# Altium PCB front.PcbDoc
Units mm, origin at the board's own origin, x right, y up, seen from the top; angles counter-clockwise.
Board outline 46.94 x 58.55 mm, 2 copper layers (Top Layer, Bottom Layer); 37 components, 16 nets, 110 pads, 10 vias.
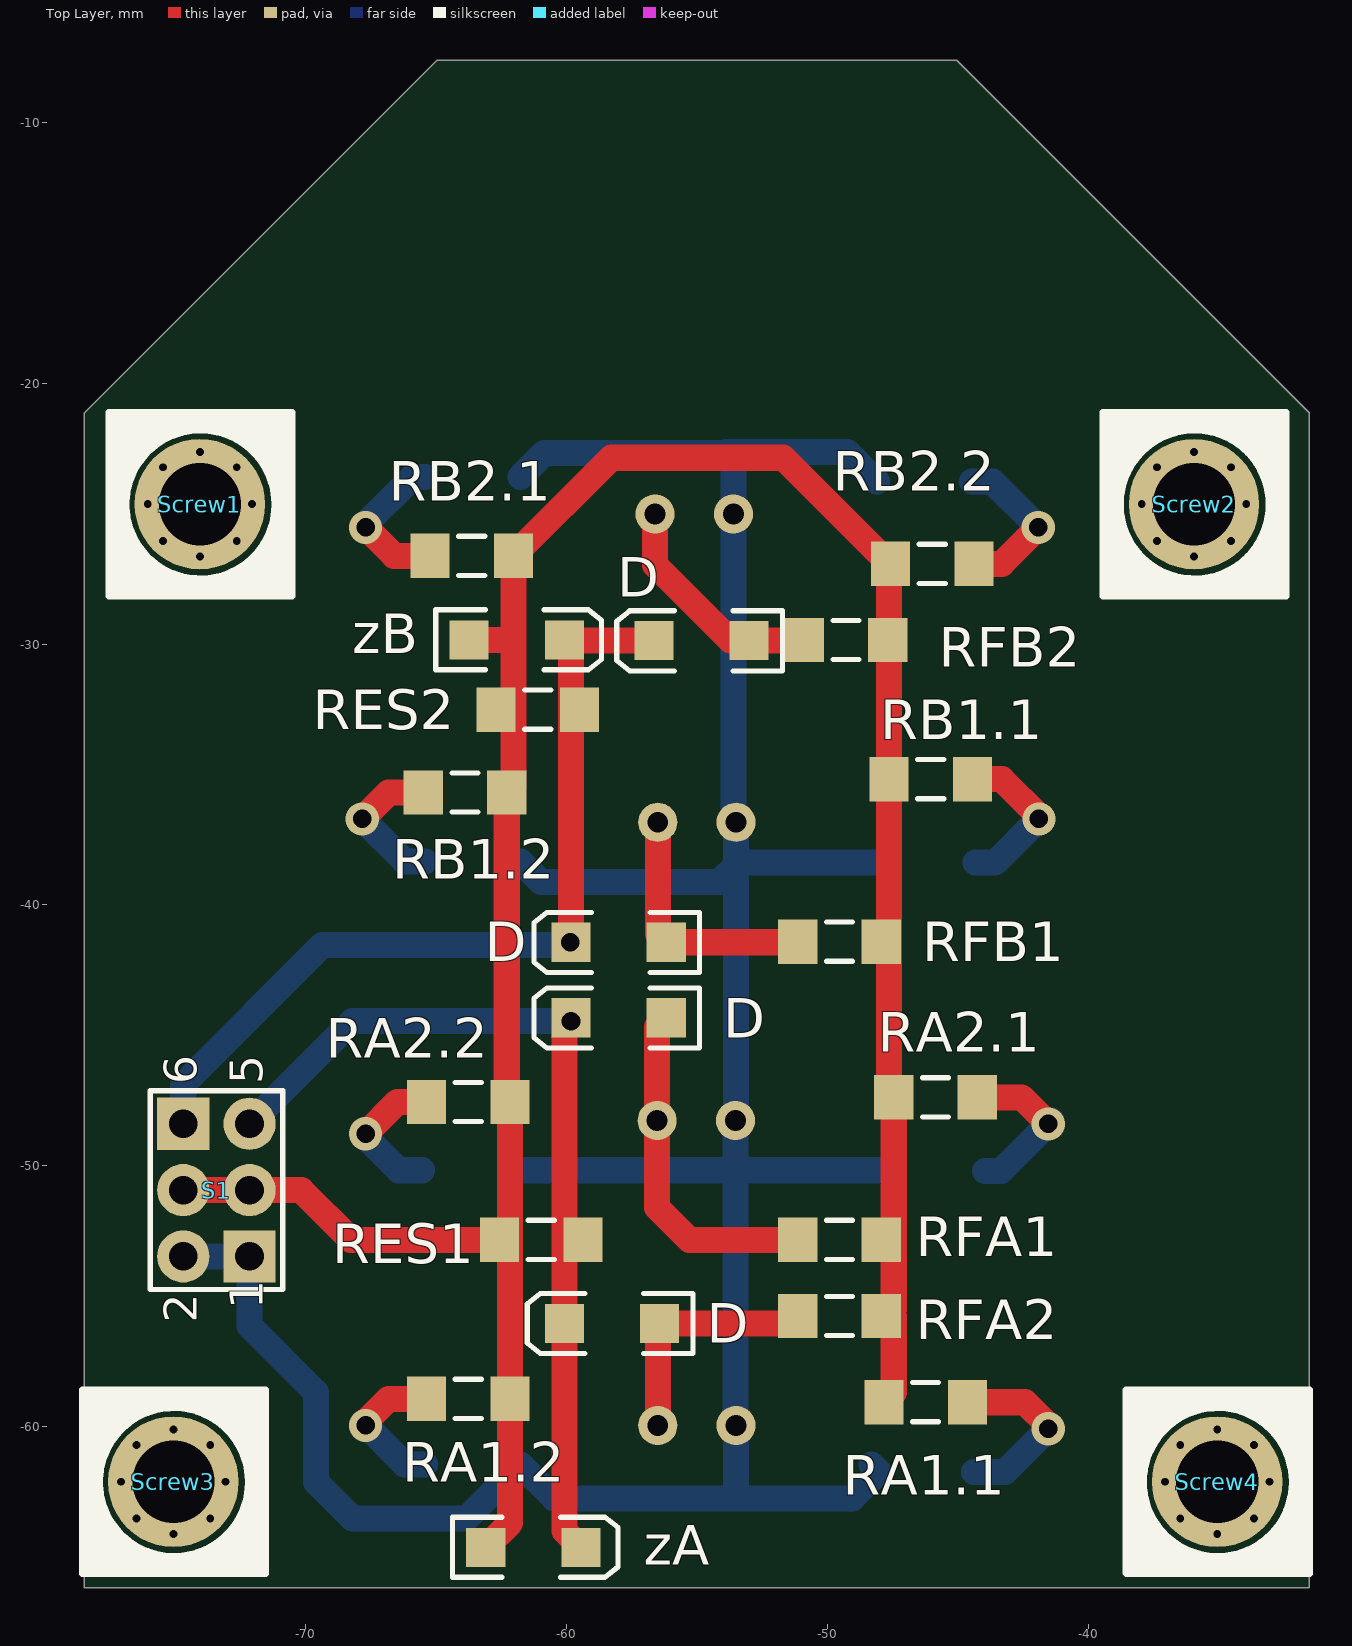
[diagram p0: Top Layer view]
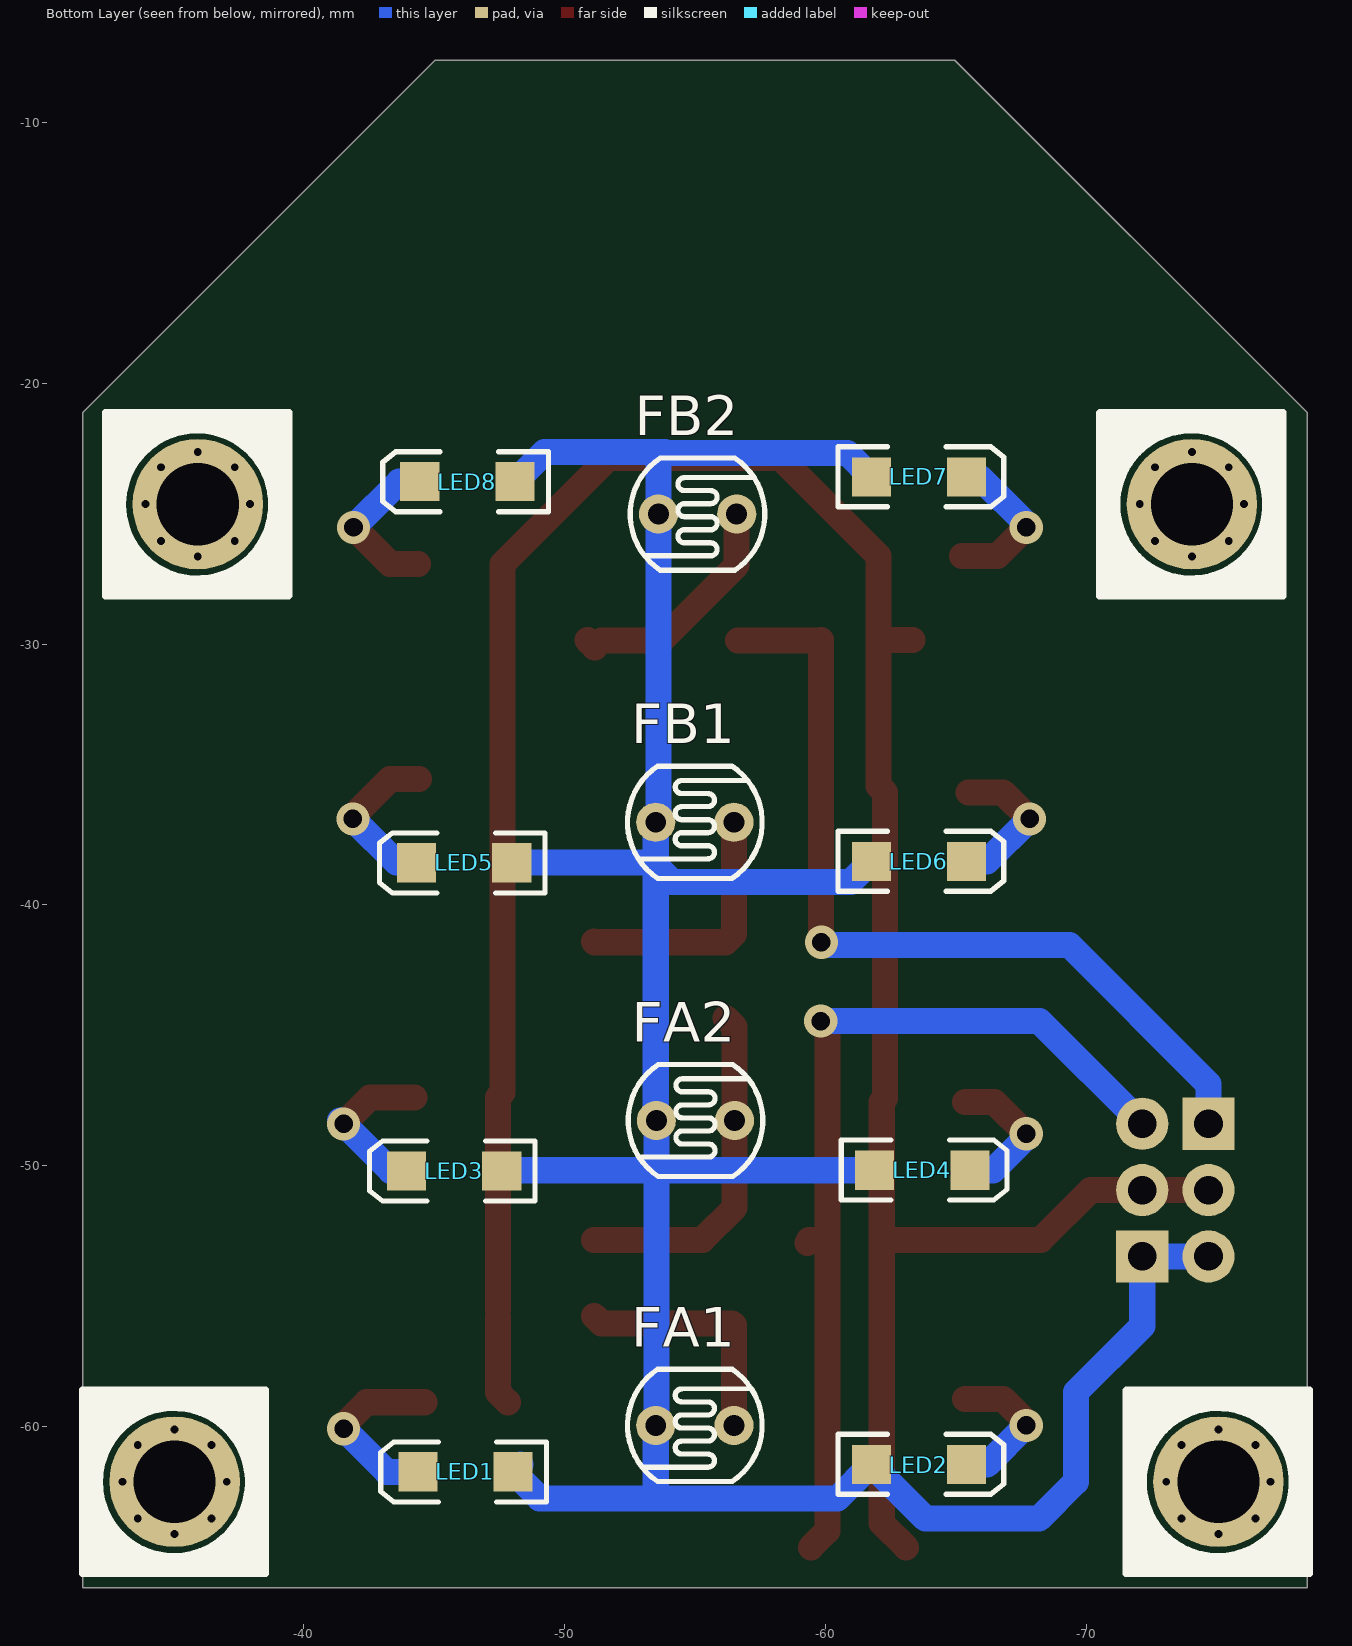
[diagram p1: Bottom Layer view, seen from below]
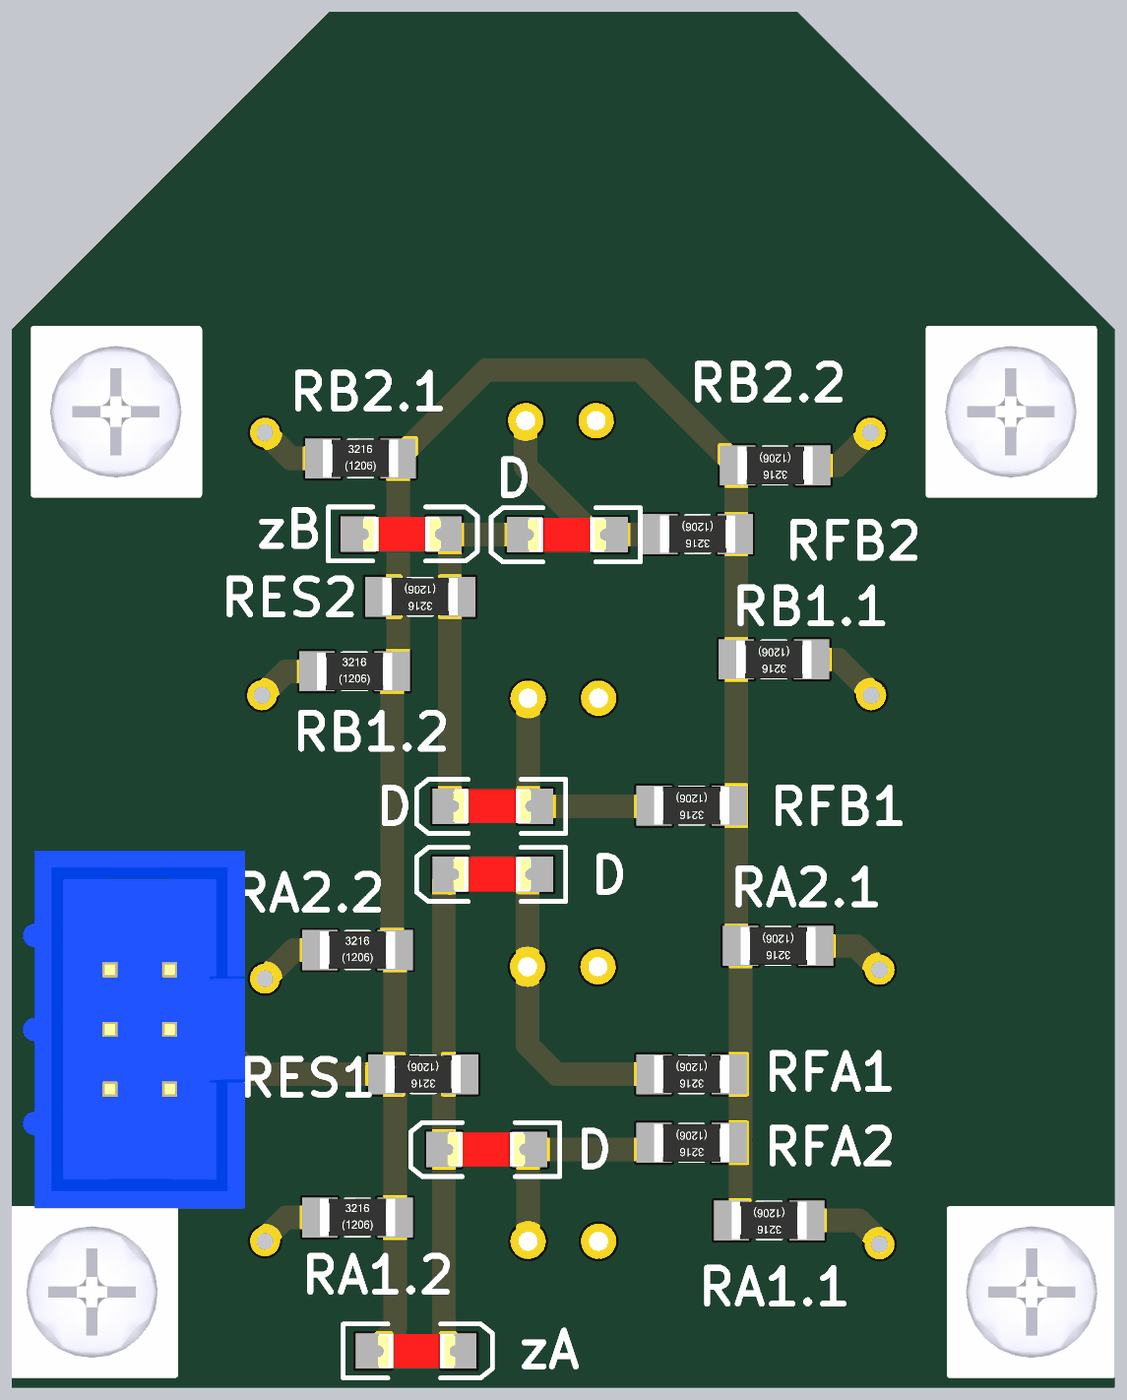
[diagram p2: 3D render of the assembled board from above, using the file's embedded part models]
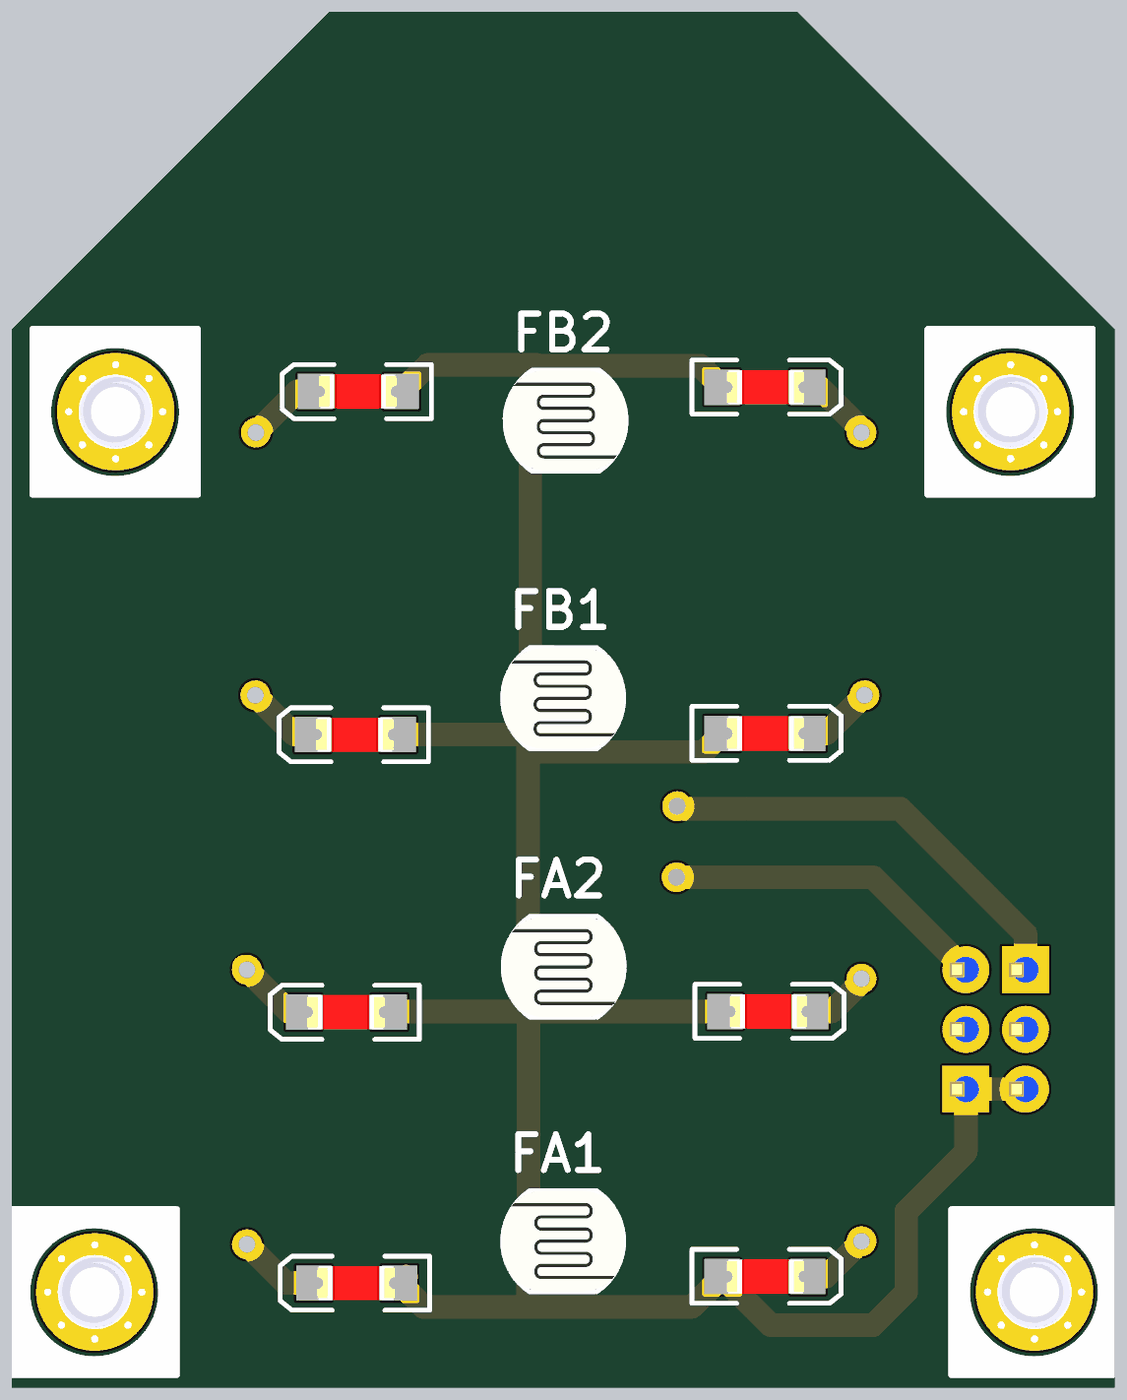
[diagram p3: 3D render of the assembled board from below, using the file's embedded part models]

## Layer stack, top to bottom
Top Solder: solder mask 0.0102, Solder Resist, Dk 3.5
Top Layer: signal copper 0.0356
Dielectric 1: dielectric 0.32, FR-4, Dk 4.8
Bottom Layer: signal copper 0.0356
Bottom Solder: solder mask 0.0102, Solder Resist, Dk 3.5

## Board outline
-78.466,-66.169 -78.466,-21.134 -64.955,-7.623 -54.995,-7.623 -45.035,-7.623 -31.524,-21.134 -31.524,-66.169 -54.995,-66.169

## Design rules (kind name [scope] priority, off if disabled: settings)
Clearance [All] p1: gap=0.5 ignorepadtopadclearanceinfootprint=FALSE
PolygonConnect [All] p1: connectstyle=Relief reliefconductorwidth=0.254 reliefentries=4 polygonreliefangle="90 Angle" airgapwidth=0.254
RoutingVias [All] p1: holewidth=0.711 width=1.27 viastyle="Through Hole" minholewidth=0.711 minwidth=1.27 maxholewidth=0.711 maxwidth=1.27
SolderMaskExpansion [All] p1: expansion=0.102
Width [All] p1: maxlimit=1 minlimit=0.254 preferedwidth=1
30 further rules are at their usual default settings.

## Components (designator, comment, footprint, x,y, rotation, side; value= is the part's Value field where it differs from the comment)
D "SMD" "LED SMD" -55.118,-29.845 r180 top (schematic designator LED12)
D "SMD" "LED SMD" -58.293,-41.402 r180 top (schematic designator LED11)
D "SMD" "LED SMD" -58.547,-56.007 r180 top (schematic designator LED10)
D "SMD" "LED SMD" -58.293,-44.298 r180 top (schematic designator LED9)
FA1 "Photo Cell" PhotoCell. -54.991,-59.944 r0 bottom
FA2 "Photo Cell" PhotoCell. -55.015,-48.26 r180 bottom
FB1 "Photo Cell" PhotoCell. -54.991,-36.83 r180 bottom
FB2 "Photo Cell" PhotoCell. -55.094,-25.019 r0 bottom
LED1 "SMD" "LED SMD" -45.899,-61.697 r0 bottom
LED2 "SMD" "LED SMD" -63.881,-61.468 r180 bottom
LED3 "SMD" "LED SMD" -45.466,-50.165 r0 bottom
LED4 "SMD" "LED SMD" -64.007,-50.19 r180 bottom
LED5 "SMD" "LED SMD" -45.847,-38.354 r0 bottom
LED6 "SMD" "LED SMD" -63.881,-38.354 r180 bottom
LED7 "SMD" "LED SMD" -63.881,-23.622 r180 bottom
LED8 "SMD" "LED SMD" -45.974,-23.749 r0 bottom
RA1.1 "SMD" "Resistor SMD 1206" -46.228,-59.055 r180 top (schematic designator RESFA1.1)
RA1.2 "SMD" "Resistor SMD 1206" -63.754,-58.928 r0 top (schematic designator RESFA1.2)
RA2.1 "SMD" "Resistor SMD 1206" -45.847,-47.371 r180 top (schematic designator RESFA2.1)
RA2.2 "SMD" "Resistor SMD 1206" -63.754,-47.549 r0 top (schematic designator RESFA2.2)
RB1.1 "SMD" "Resistor SMD 1206" -46.025,-35.179 r180 top (schematic designator RESFB1.1)
RB1.2 "SMD" "Resistor SMD 1206" -63.881,-35.687 r0 top (schematic designator RESFB1.2)
RB2.1 "SMD" "Resistor SMD 1206" -63.627,-26.622 r0 top (schematic designator RESFB2.1)
RB2.2 "SMD" "Resistor SMD 1206" -45.974,-26.924 r180 top (schematic designator RESFB2.2)
RES1 "SMD" "Resistor SMD 1206" -60.96,-52.832 r180 top
RES2 "SMD" "Resistor SMD 1206" -61.087,-32.512 r180 top
RFA1 "SMD" "Resistor SMD 1206" -49.53,-52.832 r180 top (schematic designator RESFA1)
RFA2 "SMD" "Resistor SMD 1206" -49.53,-55.753 r180 top (schematic designator RESFA2)
RFB1 "SMD" "Resistor SMD 1206" -49.53,-41.402 r180 top (schematic designator RESFB1)
RFB2 "SMD" "Resistor SMD 1206" -49.276,-29.845 r180 top (schematic designator RESFB2)
S1 "IDC 2X3" "IDC 2X3" -73.406,-50.927 r90 top
Screw1 "Screw" Screw -74.041,-24.638 r0 top locked
Screw2 "Screw" Screw -35.941,-24.638 r0 top locked
Screw3 "Screw" Screw -75.057,-62.103 r0 top locked
Screw4 "Screw" Screw -35.052,-62.103 r0 top locked
zA "zener" "LED SMD" -60.96,-64.643 r0 top (schematic designator zenerA)
zB "zener" "LED SMD" -61.595,-29.87 r0 top (schematic designator zenerB)

## Footprints (in the part's own frame and the unit in brackets; to place one, negate y for a bottom-side part, rotate by r counter-clockwise, add the part's x,y. Pads: shape width x height; smd on the part's side, far side on the other; paste and mask are expansions set on the pad)
"IDC 2X3" [mm]
  rect 2x2 hole 1.1: 1(-2.54,-1.27) 6(2.54,1.27)
  round 2 hole 1.1: 2(-2.54,1.27) 3(0,-1.27) 4(0,1.27) 5(2.54,-1.27)
  silkscreen extent -3.81,-2.54 3.81,2.54, body extent -7.62,-4.86 7.62,4.59, height 9.1
"LED SMD" [mm]
  rect 1.5x1.5 smd: 1(-2.125,0.025) 2(1.525,0.025)
  silkscreen extent -3.4,-1.12 2.95,1.18, body extent -1.92,-0.7 1.38,0.75, height 1.36
PhotoCell. [mm]
  round 1.5 hole 0.8: 1(-1.5,0) 2(1.5,0)
  silkscreen extent -2.58,-2.15 2.58,2.15, body extent -2.6,-2.16 2.61,2.14, height 2.74
"Resistor SMD 1206" [mm]
  rect 1.5x1.7 smd: 1(-1.6,0) 2(1.6,0)
  silkscreen extent -0.5,-0.75 0.5,0.75, body extent -1.6,-0.8 1.6,0.8, height 0.55
Screw [mm]
  round 0.6 hole 0.3: S(-2,0) S(-1.414,-1.414) S(-1.414,1.414) S(0,-2) S(0,2) S(1.414,-1.414) S(1.414,1.414) S(2,0)
  round 5 hole 3.15 mask+0.1: S(0,0)
  silkscreen extent -3.49,-3.53 3.56,3.52, body extent -2.8,-2.8 2.8,2.8, height 3.88

## Part data
D D D D LED1 LED2 LED3 LED4 LED5 LED6 LED7 LED8: library part "LED SMD"
FA1 FA2 FB1 FB2: library part "Photo Cell..", LatestRevisionDate=17-Jul-2002, LatestRevisionNote="Re-released for DXP Platform.", Publisher="Altium Limited"
RA1.1 RA1.2 RA2.1 RA2.2 RB1.1 RB1.2 RB2.1 RB2.2 RES1 RES2 RFA1 RFA2 RFB1 RFB2: library part "Res SMD"
zA zB: library part SMDZenerDiode
Screw1 Screw2 Screw3 Screw4: LatestRevisionDate=17-Jul-2002, LatestRevisionNote="Re-released for DXP Platform.", Publisher="Altium Limited"

## Free pads (board coordinates)
  round 1.524 hole 3: 5(-74.041,-24.638) 6(-35.941,-24.638) 7(-75.057,-62.103) 8(-35.052,-62.103)

## Via types
v1: diameter 1.27, hole 0.711, Top Layer to Bottom Layer, 10 vias

## Nets (pads, with @x,y where several pads share a name; then routed paths per layer and width w, separated by ;. In a path a pad name is that pad's centre, name@x,y a point inside that pad or via, vN(x,y) a via of type N, cw(c..) or ccw(c..) an arc to the next point about the centre after c; other vN are vias at no path point)
GND: RA1.1.2 RA1.2.2 RA2.1.2 RA2.2.2 RB1.1.2 RB1.2.2 RB2.1.2 RB2.2.2 RES1.2 RES2.2 RFA1.1 RFA2.1 RFB1.1 RFB2.1 S1.3 S1.4 zA.1 zB.1 | length 102.5
  Top Layer w1: S1.4 S1.3 -70.155,-50.927 -68.25,-52.832 RES1.2 ; zB.1@-63.339,-29.845 -62.027,-29.845 ; zA.1 -62.154,-63.687 RA1.2.2 RA2.2.2 -62.281,-47.422 RB1.2.2 -62.027,-35.433 -62.027,-29.845 ; RA1.1.2 -47.447,-58.674 RFA2.1@-47.447,-55.753 ; RFA2.1@-47.447,-55.499 RA2.1.2 -47.625,-47.193 RB1.1.2 -47.625,-26.924 -51.689,-22.86 -58.265,-22.86 RB2.1.2 -62.027,-29.845
NetFA1_1: D.1@-56.422,-56.032 FA1.1 RFA2.2 | length 9.3
  Top Layer w1: FA1.1 -56.491,-56.101 -56.422,-56.032 -51.409,-56.032 RFA2.2
NetFA2_2: D.1@-56.168,-44.323 FA2.2 RFA1.2 | length 13.3
  Top Layer w1: D.1@-56.168,-44.323 -56.515,-44.67 FA2.2 -56.515,-51.596 -55.279,-52.832 RFA1.2
NetFB1_2: D.1@-56.168,-41.427 FB1.2 RFB1.2 | length 9.8
  Top Layer w1: FB1.2 -56.491,-41.104 -56.168,-41.427 -51.155,-41.427 RFB1.2
NetFB2_1: D.1@-52.993,-29.87 FB2.1 RFB2.2 | length 9.1
  Top Layer w1: FB2.1 -56.594,-26.972 -53.696,-29.87 -52.993,-29.87 -51.409,-29.87 -51.155,-30.124 RFB2.2
NetLED1_2: LED1.2 RA1.1.1 | length 7.1
  Top Layer w1: RA1.1.1 -42.418,-59.055 -41.529,-59.944 v1(-41.529,-60.071)
  Bottom Layer w1: LED1.2 -43.18,-61.722 v1(-41.529,-60.071)
NetLED2_2: LED2.2 RA1.2.1 | length 5.9
  Top Layer w1: v1(-67.691,-59.944) -67.818,-59.944 -66.802,-58.928 RA1.2.1
  Bottom Layer w1: v1(-67.691,-59.944) -66.192,-61.443 LED2.2
NetLED3_2: LED3.2 RA2.1.1 | length 6.5
  Top Layer w1: RA2.1.1 -42.545,-47.371 v1(-41.529,-48.387)
  Bottom Layer w1: LED3.2 -43.332,-50.19 v1(-41.529,-48.387) v1@-41.402,-48.26
NetLED4_2: LED4.2 RA2.2.1 | length 5.8
  Top Layer w1: v1(-67.691,-48.768) -66.472,-47.549 RA2.2.1
  Bottom Layer w1: v1(-67.691,-48.768) -67.818,-48.768 -66.421,-50.165 LED4.2
NetLED5_2: LED5.2 RB1.1.1 | length 6.5
  Top Layer w1: RB1.1.1 -43.307,-35.179 -41.783,-36.703 v1(-41.886,-36.703)
  Bottom Layer w1: LED5.2 -43.562,-38.379 v1(-41.886,-36.703)
NetLED6_2: LED6.2 RB1.2.1 | length 5.8
  Top Layer w1: v1(-67.818,-36.703) -66.802,-35.687 RB1.2.1
  Bottom Layer w1: v1(-67.818,-36.703) -66.192,-38.329 LED6.2
NetLED7_2: LED7.2 RB2.1.1 | length 6.3
  Top Layer w1: v1(-67.691,-25.527) -66.596,-26.622 RB2.1.1
  Bottom Layer w1: v1(-67.691,-25.527) -67.818,-25.527 -65.888,-23.597 LED7.2
NetLED8_2: LED8.2 RB2.2.1 | length 6.3
  Top Layer w1: RB2.2.1 -43.307,-26.924 v1(-41.91,-25.527)
  Bottom Layer w1: LED8.2 -43.663,-23.774 v1(-41.91,-25.527)
OUTFA: D.2@-59.818,-44.323 D.2@-60.072,-56.032 RES1.1 S1.5 zA.2 | length 35
  Top Layer w1: RES1.1@-60.072,-52.959 -60.072,-56.032 -60.072,-63.981 zA.2 ; RES1.1@-60.072,-52.832 D.2@-60.072,-44.577 ; RES1.1@-59.944,-52.832 RES1.1@-59.436,-52.832 ; RES1.1 RES1.1@-59.436,-52.832 ; RES1.1@-59.309,-52.959 RES1.1@-59.436,-52.832
  Bottom Layer w1: S1.5 -68.199,-44.45 v1(-59.817,-44.45) v1@-59.69,-44.45
OUTFB: D.2@-56.643,-29.87 D.2@-59.818,-41.427 RES2.1 S1.6 zB.2 | length 33.4
  Top Layer w1: v1(-59.842,-41.427) -59.818,-41.427 -59.818,-29.845 -59.793,-29.87 D.2@-56.643,-29.87
  Bottom Layer w1: S1.6 -74.676,-46.863 -69.342,-41.529 -59.944,-41.529 v1(-59.842,-41.427)
VCC: FA1.2 FA2.1 FB1.1 FB2.2 LED1.1 LED2.1 LED3.1 LED4.1 LED5.1 LED6.1 LED7.1 LED8.1 S1.1 S1.2 | length 119.8
  Bottom Layer w1: S1.2 S1.1 -72.136,-56.134 -69.596,-58.674 -69.596,-62.103 -68.182,-63.517 -63.83,-63.517 LED2.1 -60.461,-62.738 -53.467,-62.738 ; LED6.1 -60.969,-39.116 -54.126,-39.116 -53.491,-38.481 ; LED7.1 -60.833,-22.674 -53.848,-22.674 -53.594,-22.928 FB2.2 -53.594,-36.727 FB1.1 -53.491,-38.481 ; LED4.1@-61.595,-50.165 -53.515,-50.165 ; -53.848,-22.638 -49.235,-22.638 LED8.1 ; LED1.1@-48.303,-61.443 LED1.1 -49.04,-62.738 -53.467,-62.738 ; LED5.1 -53.389,-38.379 -53.491,-38.481 ; LED3.1 -47.616,-50.165 -53.515,-50.165 ; -53.515,-50.165 FA2.1 -53.491,-48.236 -53.491,-38.481 ; -53.515,-50.165 -53.515,-59.92 FA1.2 -53.491,-62.714 -53.467,-62.738
pads on no net: Screw1.S Screw2.S Screw3.S Screw4.S

## Silkscreen, mask and mechanical layers (free items; w line width, h text height)
Mechanical 1:
  circle w0.013: c-34.995,-62.123 r1.5
  circle w0.013: c-74.995,-62.123 r1.5
  circle w0.013: c-35.995,-24.623 r1.5
  circle w0.013: c-73.995,-24.623 r1.5
  lines w0.013: -78.466,-66.169 -78.466,-21.134 -64.955,-7.623 -54.995,-7.623 -45.035,-7.623 -31.524,-21.134 -31.524,-66.169 -54.995,-66.169 -78.466,-66.169
Mechanical 2:
  circle w0.013: c-54.995,-25.033 r2.6
  circle w0.013: c-54.995,-36.696 r2.6
  circle w0.013: c-54.995,-48.36 r2.6
  circle w0.013: c-54.995,-60.023 r2.6
  lines w0.013: -67.495,-64.623 -60.592,-64.623 -60.592,-16.623 -67.495,-16.623 -67.495,-64.623 ; -49.399,-64.623 -42.495,-64.623 -42.495,-16.623 -49.399,-16.623 -49.399,-64.623

## Text inside footprints (layer, text, board x,y; h text height)
S1: Top Overlay "1" at -71.628,-55.499 h1.27 r90; Top Overlay "2" at -74.168,-56.007 h1.27 r90; Top Overlay "5" at -71.628,-46.863 h1.27 r90; Top Overlay "6" at -74.168,-46.863 h1.27 r90